# EAGLE board tl300-4c-driver_sch-pcb (EAGLE 9.5.1)
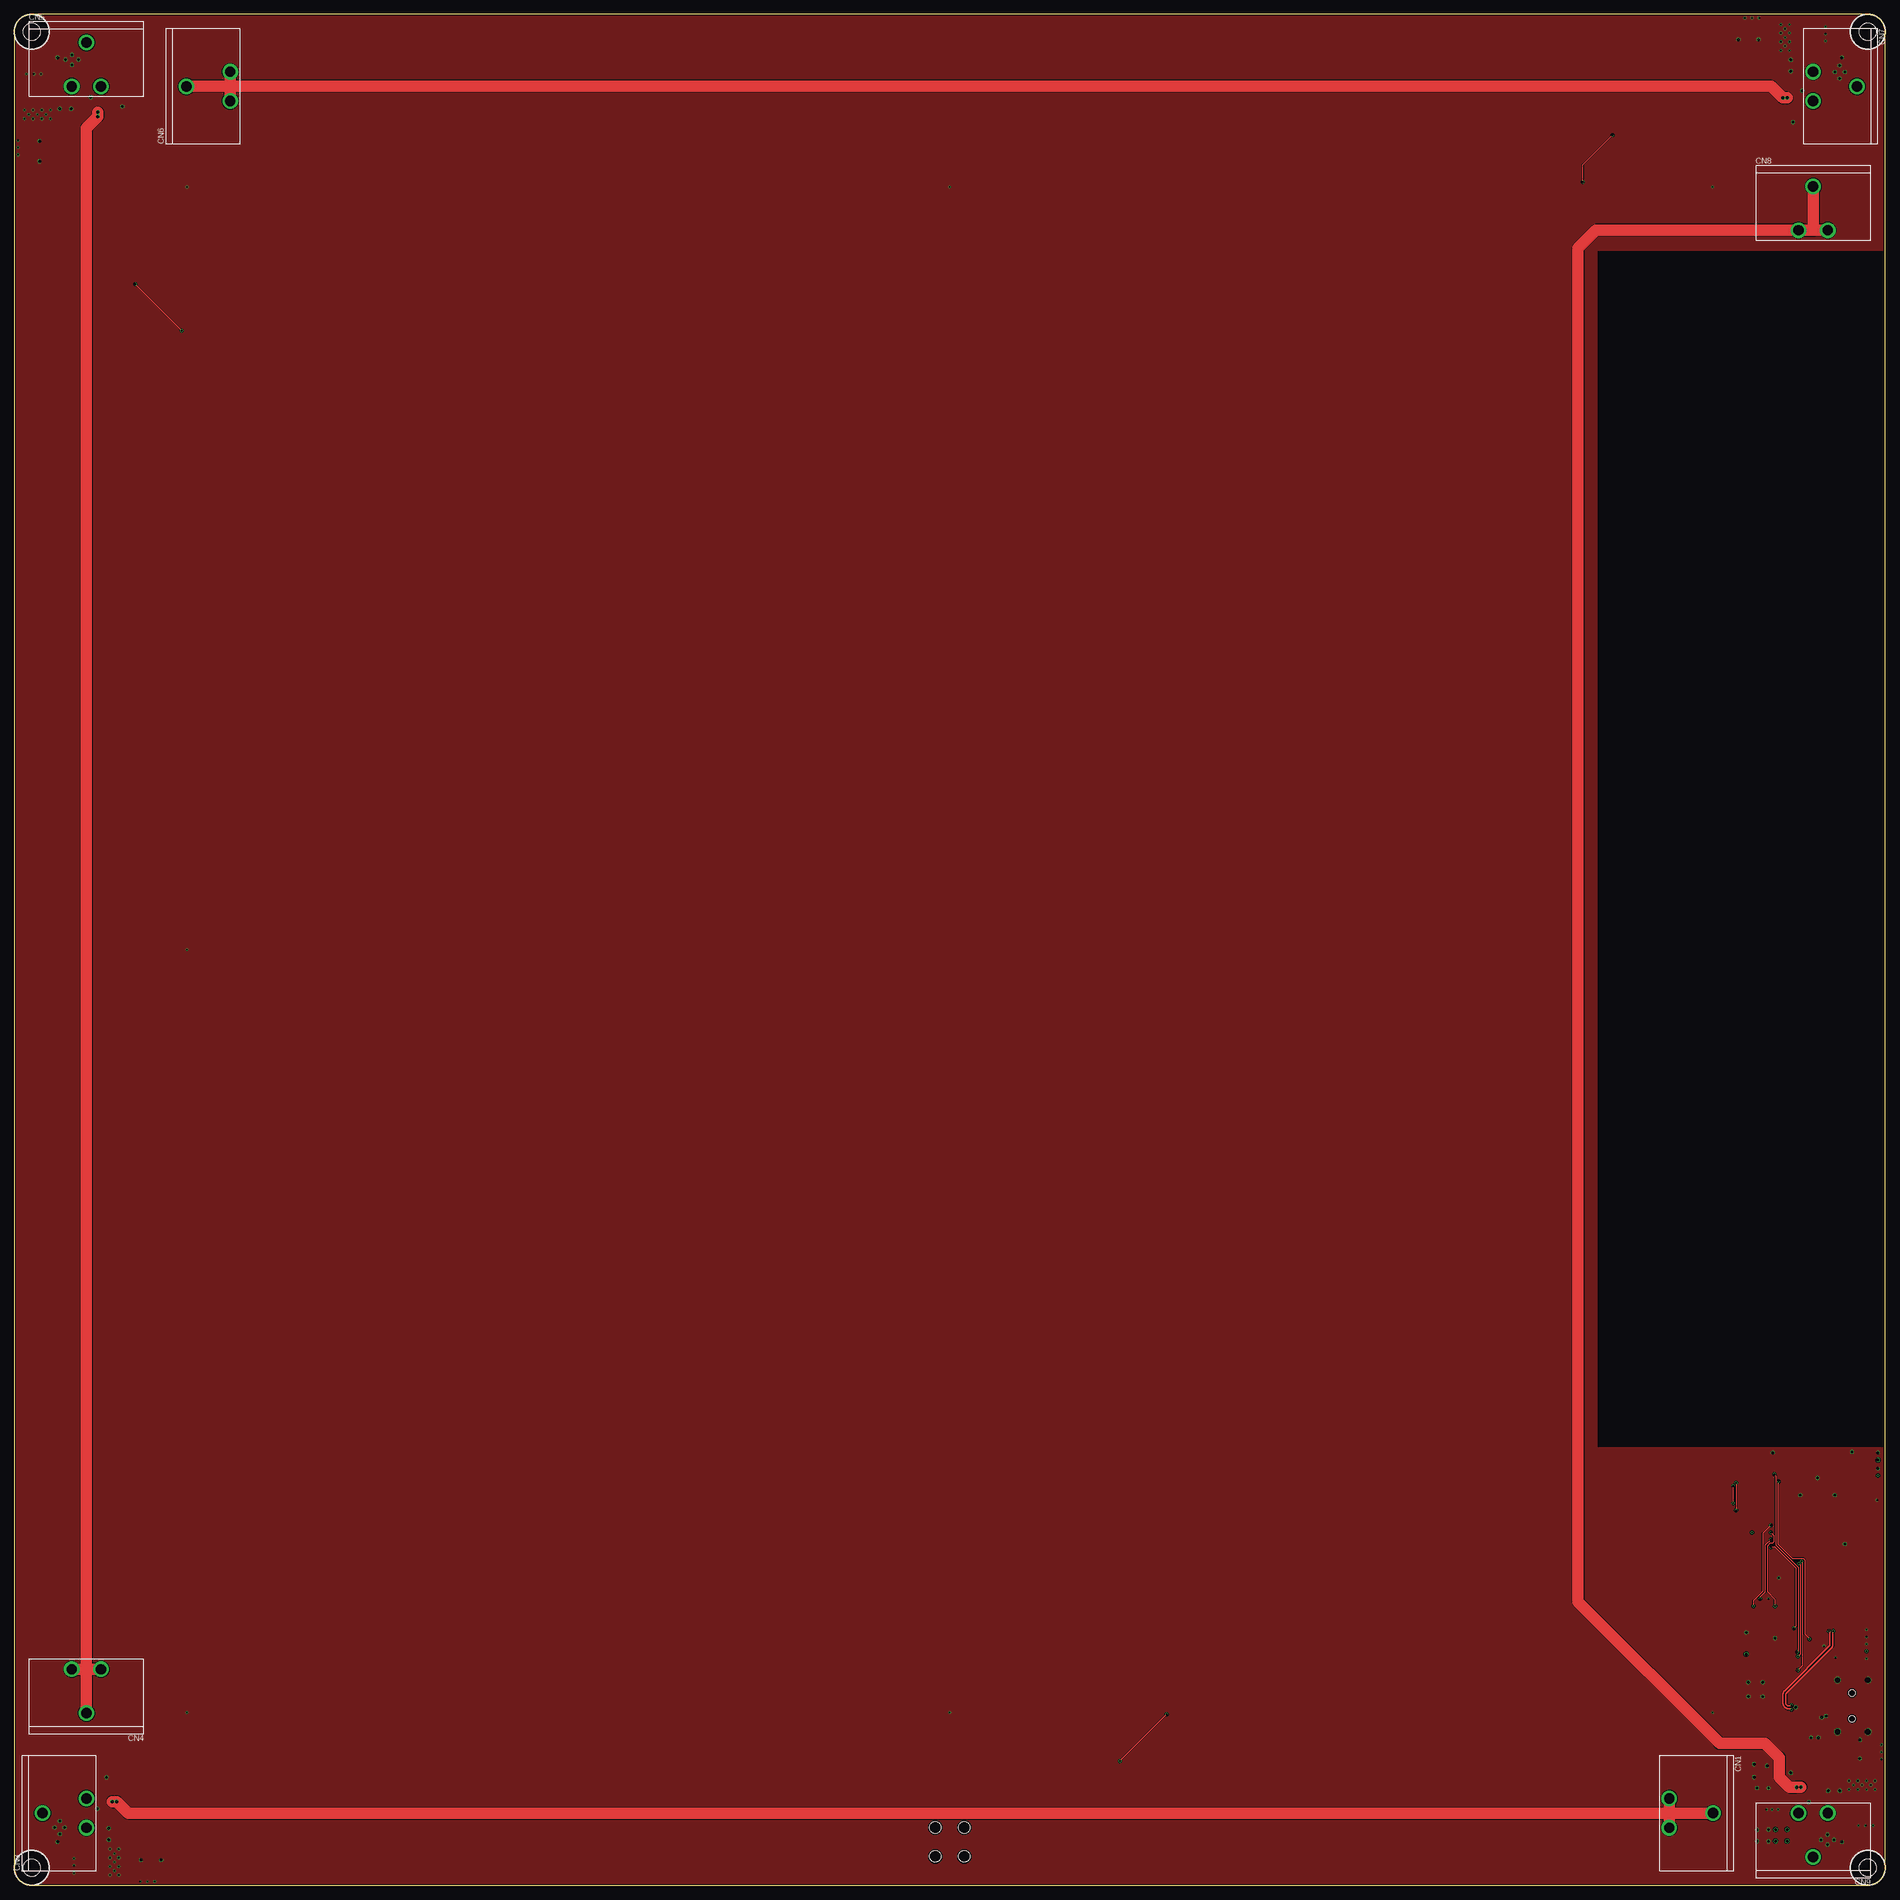
[diagram p0: board, top side]
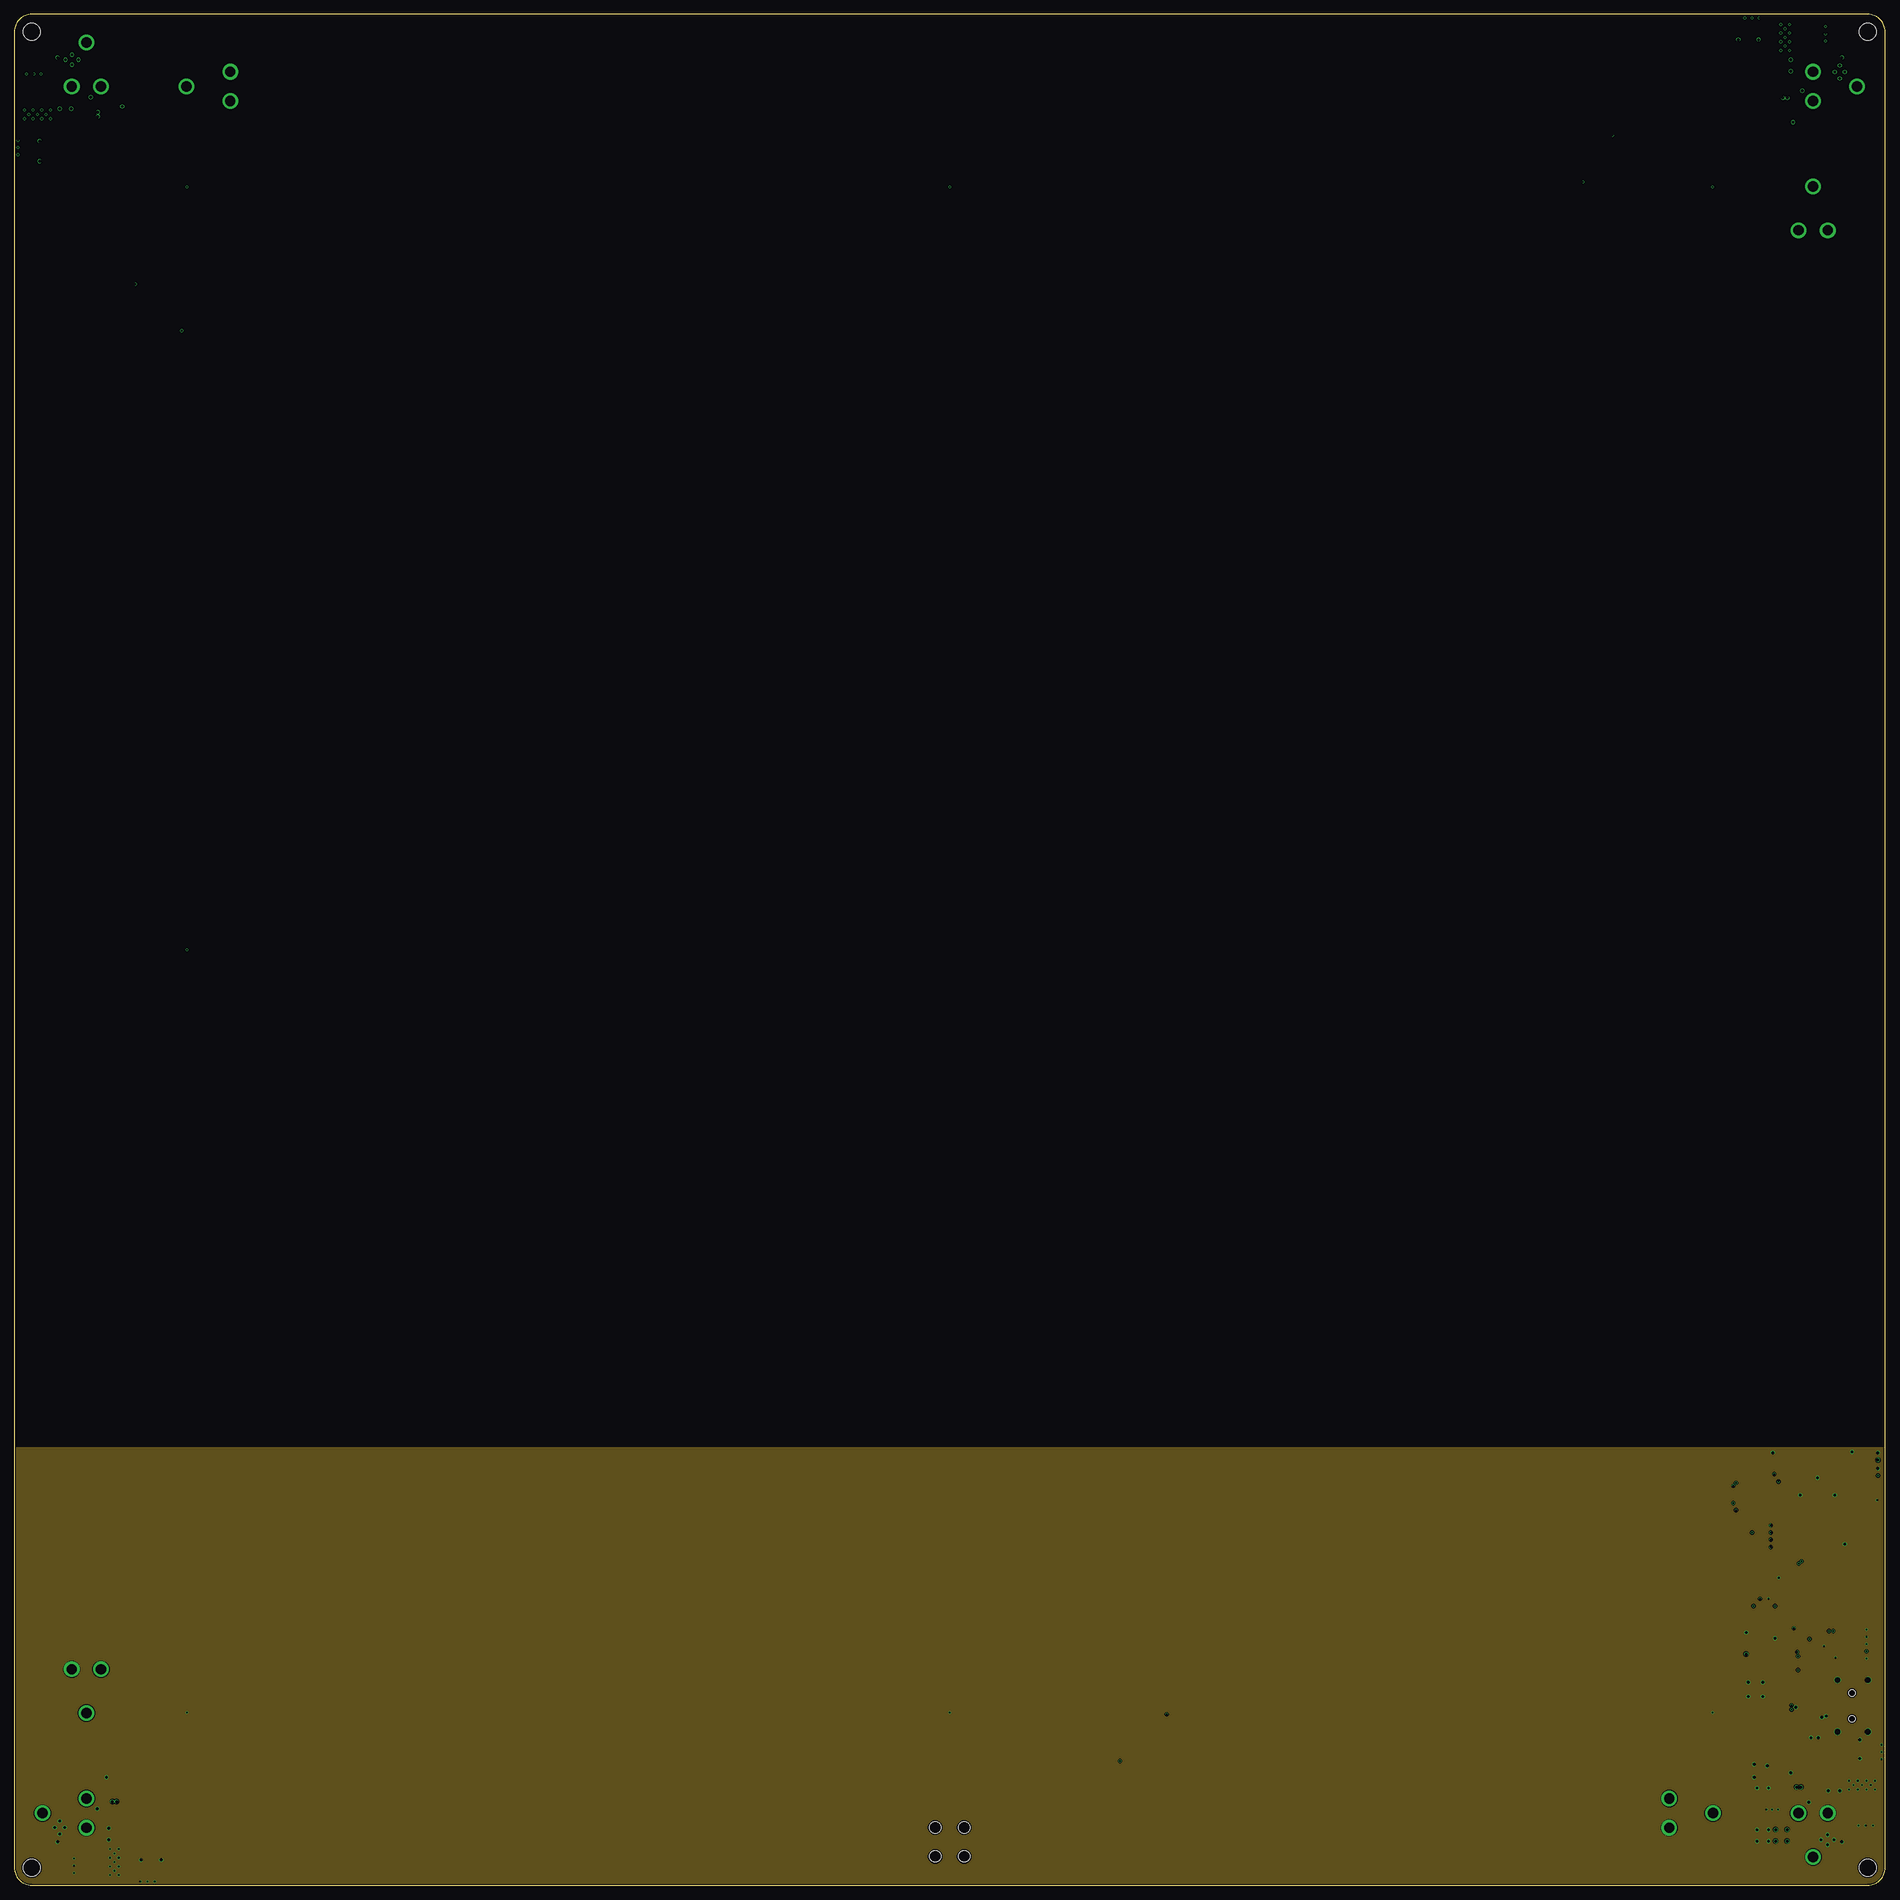
[diagram p1: board, inner layer GND]
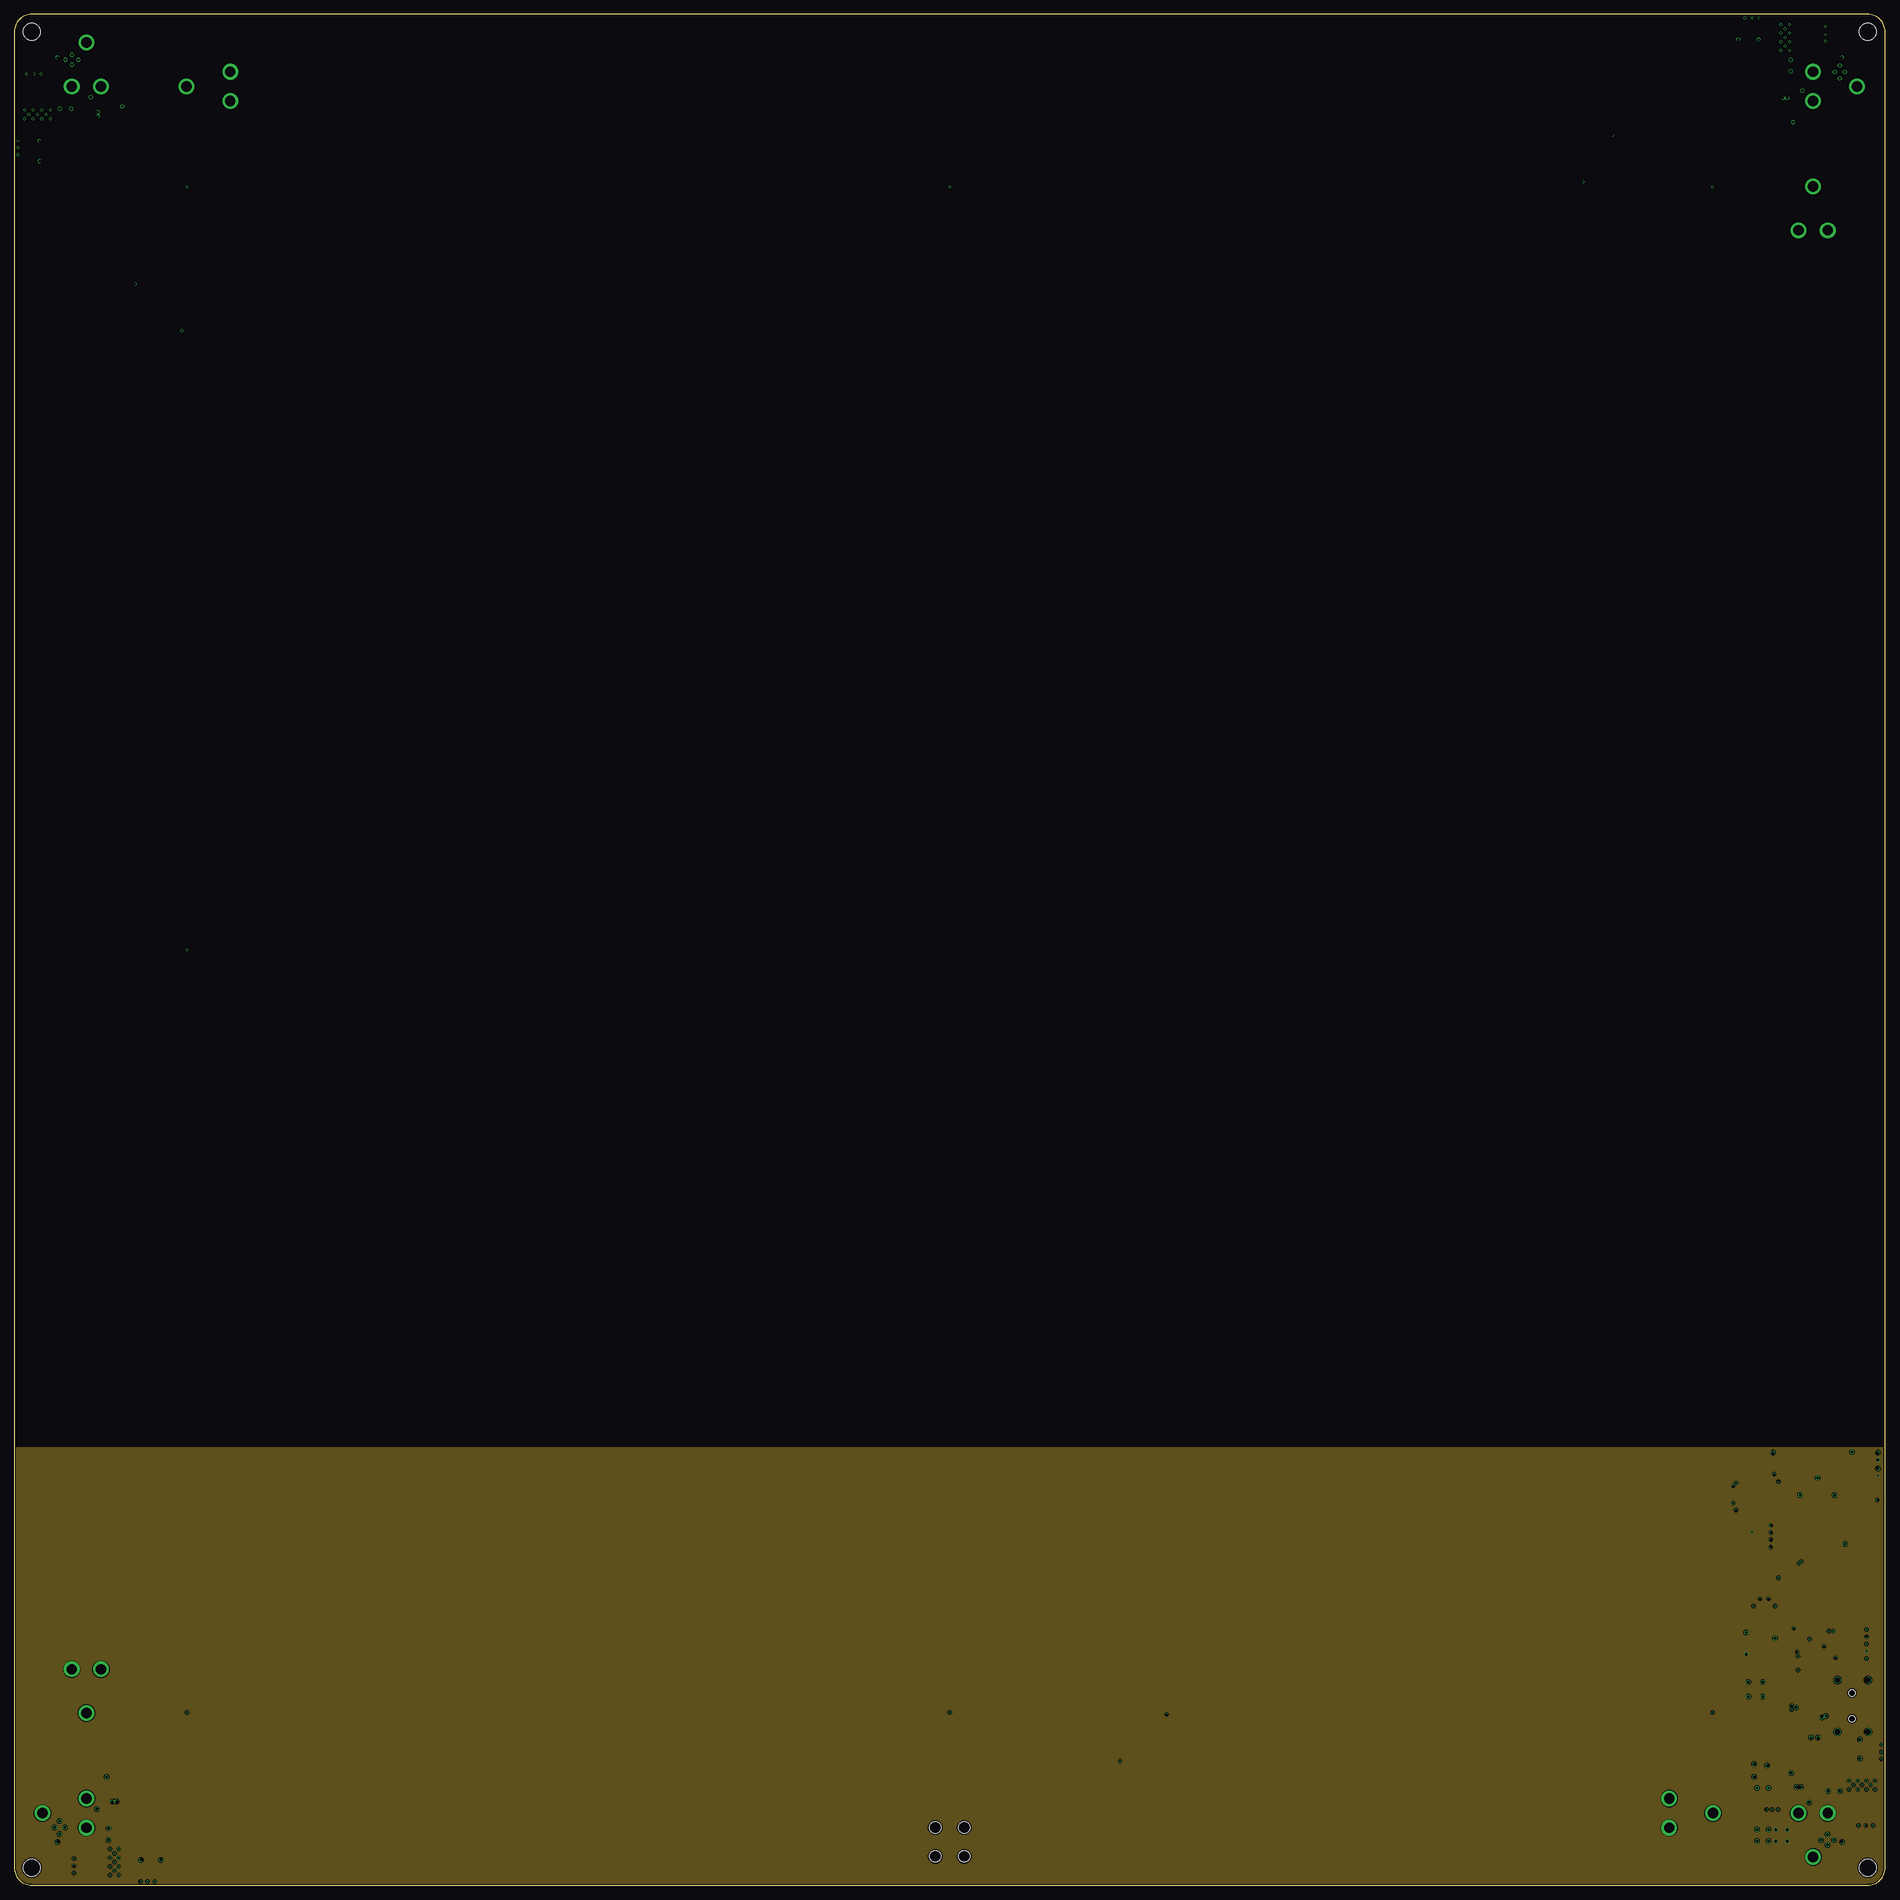
[diagram p2: board, inner layer PWR]
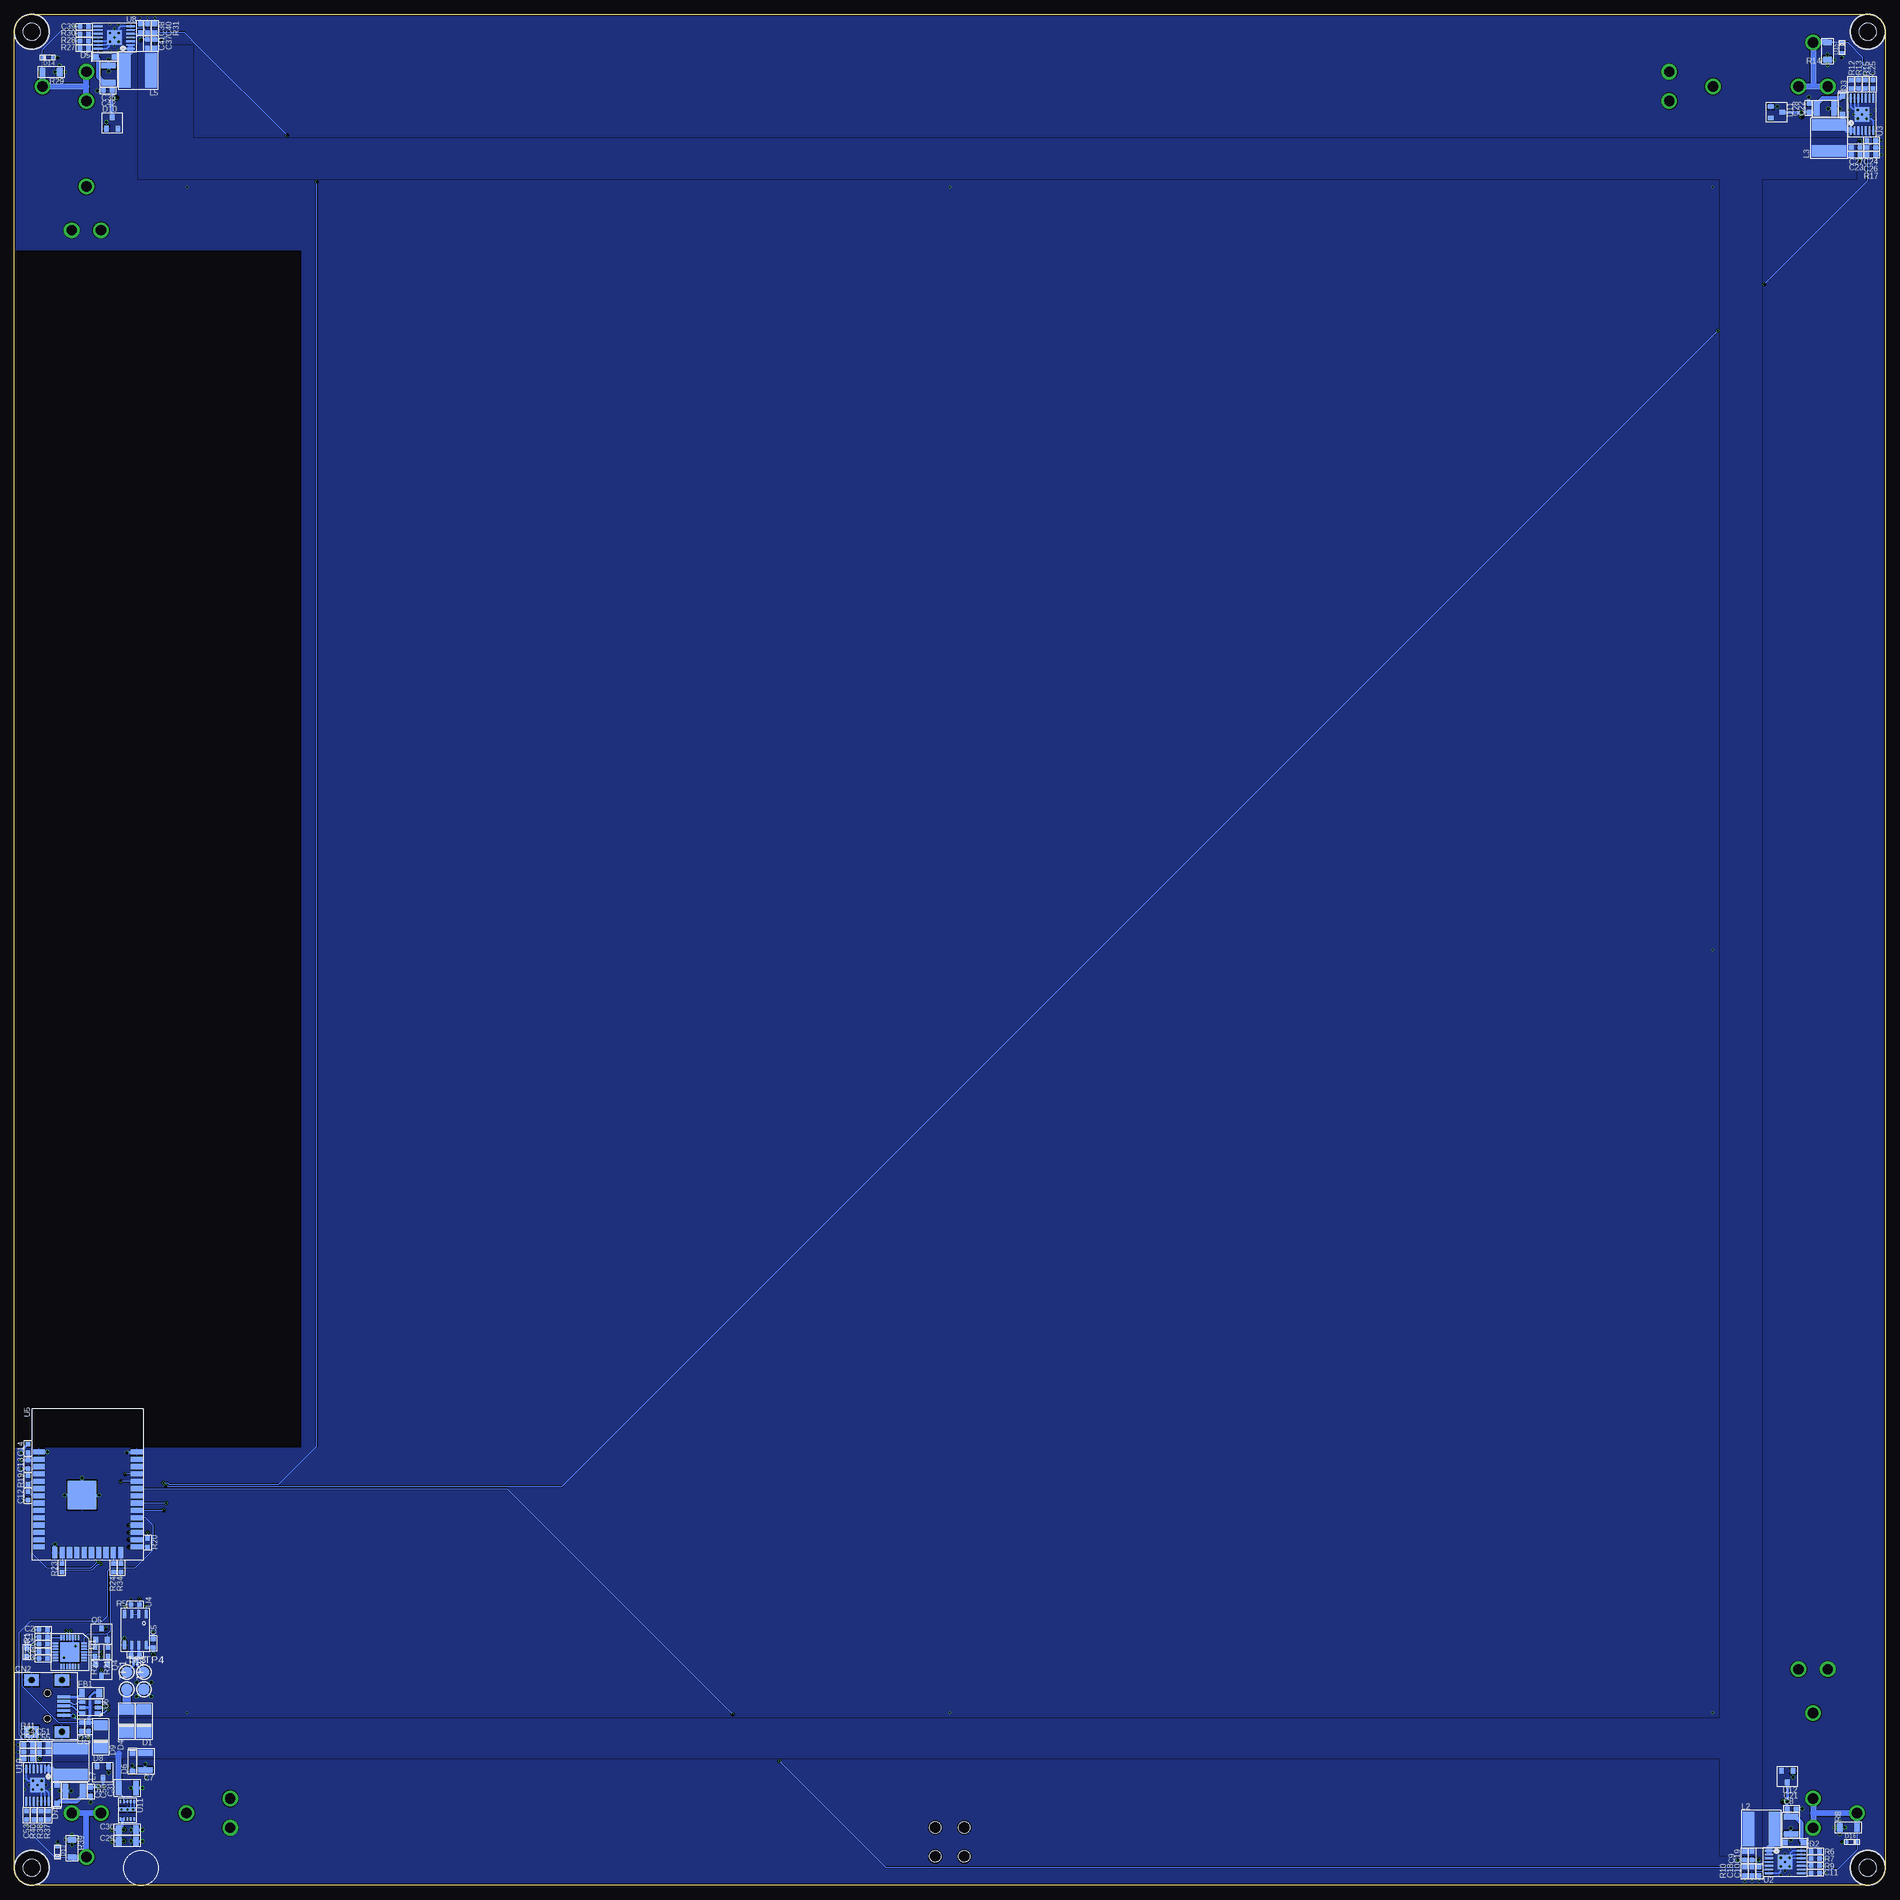
[diagram p3: board, bottom side, seen from below]

Size 325 x 325 mm. Coordinates in mm from the lower left corner, seen from the top.
Outline: 322,0 arc90 325,3 325,322 arc90 322,325 3,325 arc90 0,322 0,3 arc90 3,0 322,0
Copper layers (1*2*3*16): Top 0.035mm / dielectric 1.11mm / GND 0.035mm / dielectric 0.15mm / PWR 0.035mm / dielectric 0.2mm / Bottom 0.035mm
Design rules "myDRC 4 layers 0.15mm *": minimum track width 0.15mm, minimum drill 0.3mm, track to track 0.15mm, track to pad 0.15mm, pad to pad 0.15mm, via to via 0.15mm, smd to smd 0mil, copper to edge 0.25mm, drill to drill 0.25mm, minimum pad ring 10mil, minimum via ring 3mil, stop-mask expansion 4mil, vias tented up to drill 1mm, thermal gap 10mil
Holes 2 mm at 165,10 160,10 165,5 160,5

## Footprints (pad centres in the part's own frame; a part is rotated, then mirrored left to right if it is on the bottom)
0603 = smd 0.8 x 0.8: 1 -0.75,0; 2 0.75,0
1210 = smd 1 x 2.5: 1 -1.5,0; 2 1.5,0
1206 = smd 1 x 1.5: 1 1.5,0; 2 -1.5,0
KEYSTONE_54 = drill 1.8: P$1 -2.54,0; P$2 2.54,0; P$3 0,7.62
MUSB-05-S-B-SM-A = smd 0.5 x 2.25: D+ 0,2.8; D- -0.8,2.8; GND 1.6,2.8; ID 0.8,2.8; VCC -1.6,2.8 | smd 2 x 2.5: SHIELD1 -4.5,2.5; SHIELD2 4.5,2.5; SHIELD3 4.5,-2.75; SHIELD4 -4.5,-2.75 | hole 1.1: 2.25,0; -2.25,0
DO214AC = smd 1.75 x 2.5: A -2,0; K 2,0
SOD-123 = smd 0.9 x 0.95: A -1.575,0; K 1.575,0
SOT23-3 = smd 0.8 x 1: 1 -1,-1; 2 0,1; 3 1,-1
SC-79 = smd 0.75 x 0.5: A 0,-0.875; K 0,0.875
SRN6045 = smd 2 x 6: 1 -2.25,0; 2 2.25,0
MOUNTHOLE_6X3 = hole 3: 0,0
2MM_TEST_PAD = smd 2 x 2: 1 0,0
QFN28 = smd 0.95 x 0.3: 1 -2.5,1.5; 2 -2.5,1; 3 -2.5,0.5; 4 -2.5,0; 5 -2.5,-0.5; 6 -2.5,-1; 7 -2.5,-1.5; 15 2.5,-1.5; 16 2.5,-1; 17 2.5,-0.5; 18 2.5,0; 19 2.5,0.5; 20 2.5,1; 21 2.5,1.5 | smd 0.3 x 0.95: 8 -1.5,-2.5; 9 -1,-2.5; 10 -0.5,-2.5; 11 0,-2.5; 12 0.5,-2.5; 13 1,-2.5; 14 1.5,-2.5; 22 1.5,2.5; 23 1,2.5; 24 0.5,2.5; 25 0,2.5; 26 -0.5,2.5; 27 -1,2.5; 28 -1.5,2.5 | smd 3.35 x 3.35: 29 0,0
HTSSOP14-4.5 = smd 1.5 x 0.3: 1 -2.8,1.95; 2 -2.8,1.3; 3 -2.8,0.65; 4 -2.8,0; 5 -2.8,-0.65; 6 -2.8,-1.3; 7 -2.8,-1.95; 8 2.8,-1.95; 9 2.8,-1.3; 10 2.8,-0.65; 11 2.8,0; 12 2.8,0.65; 13 2.8,1.3; 14 2.8,1.95 | smd 2.5 x 2.5: PAD 0,0
SO8 = smd 1.5 x 0.55: 1 -2.7,1.875; 2 -2.7,0.625; 3 -2.7,-0.625; 4 -2.7,-1.875; 5 2.7,-1.875; 6 2.7,-0.625; 7 2.7,0.625; 8 2.7,1.875
ESP32-WROOM-32D = smd 2 x 0.9: 1 -8.5,5.25; 2 -8.5,3.98; 3 -8.5,2.71; 4 -8.5,1.44; 5 -8.5,0.17; 6 -8.5,-1.1; 7 -8.5,-2.37; 8 -8.5,-3.64; 9 -8.5,-4.91; 10 -8.5,-6.18; 11 -8.5,-7.45; 12 -8.5,-8.72; 13 -8.5,-9.99; 14 -8.5,-11.26; 25 8.5,-11.26; 26 8.5,-9.99; 27 8.5,-8.72; 28 8.5,-7.45; 29 8.5,-6.18; 30 8.5,-4.91; 31 8.5,-3.64; 32 8.5,-2.37; 33 8.5,-1.1; 34 8.5,0.17; 35 8.5,1.44; 36 8.5,2.71; 37 8.5,3.98; 38 8.5,5.25 | smd 0.9 x 2: 15 -5.715,-12.26; 16 -4.445,-12.26; 17 -3.175,-12.26; 18 -1.905,-12.26; 19 -0.635,-12.26; 20 0.635,-12.26; 21 1.905,-12.26; 22 3.175,-12.26; 23 4.445,-12.26; 24 5.715,-12.26 | smd 5 x 5: 39 -1,-2.25
SOT23-6 = smd 0.6 x 1.1: 1 0.95,1.35; 2 0,1.35; 3 -0.95,1.35; 4 -0.95,-1.35; 5 0,-1.35; 6 0.95,-1.35
TI_MICROSIP_10 = smd 0.65 x 0.3: 1 -1.5,1.2; 2 -1.5,0.6; 3 -1.5,0; 4 -1.5,-0.6; 5 -1.5,-1.2; 6 1.5,-1.2; 7 1.5,-0.6; 8 1.5,0; 9 1.5,0.6; 10 1.5,1.2 | smd 0.7 x 2.9: PAD -0.175,0

## Placement (x,y rotation side)
C1  100nF 16V  [0603]  320,43.12 0 bottom
C2  4.7uF 6.3V  [0603]  320,44.38 0 bottom
C3  100nF 16V  [0603]  313.38,27.5 90 bottom
C4  1nF 50V  [0603]  312.12,27.5 90 bottom
C5  100nF 16V  [0603]  300.88,42 270 bottom
C7  10uF 50V  [1210]  302.25,21.5 90 bottom
C8  10uF 50V  [1210]  16.38,10.38 90 bottom
C9  2.2uF 25V  [0603]  24.38,5.12 90 bottom
C10  47nF 16V  [0603]  21.88,2.38 90 bottom
C11  470nF 25V  [0603]  12.12,2.12 180 bottom
C12  1nF 50V  [0603]  322.62,67.62 90 bottom
C13  100nF 16V  [0603]  322.62,73.12 90 bottom
C14  10uF 10V  [0603]  322.62,75.88 270 bottom
C18  1uF 25V  [0603]  23.12,2.38 90 bottom
C19  100nF 100V  [0603]  23.12,5.12 90 bottom
C21  100nF 100V  [0603]  16.25,13.25 180 bottom
C22  10uF 50V  [1210]  10.38,308.62 180 bottom
C23  2.2uF 25V  [0603]  5.12,300.62 180 bottom
C24  47nF 16V  [0603]  2.38,303.12 180 bottom
C25  470nF 25V  [0603]  2.12,312.88 270 bottom
C26  1uF 25V  [0603]  2.38,301.88 180 bottom
C27  100nF 100V  [0603]  5.12,301.88 180 bottom
C28  100nF 100V  [0603]  13.25,308.75 270 bottom
C29  22uF 10V  [1206]  305.38,7.62 0 bottom
C30  22uF 10V  [1206]  305.38,9.62 0 bottom
C31  10uF 50V  [1210]  305.38,16.88 180 bottom
C36  10uF 50V  [1210]  308.62,314.62 270 bottom
C37  2.2uF 25V  [0603]  300.62,319.88 270 bottom
C38  47nF 16V  [0603]  303.12,322.62 270 bottom
C39  470nF 25V  [0603]  312.88,322.88 0 bottom
C40  1uF 25V  [0603]  301.88,322.62 270 bottom
C41  100nF 100V  [0603]  301.88,319.88 270 bottom
C42  100nF 100V  [0603]  308.75,311.75 0 bottom
C50  10uF 50V  [1210]  314.62,16.38 0 bottom
C51  2.2uF 25V  [0603]  319.88,24.38 0 bottom
C52  47nF 16V  [0603]  322.62,21.88 0 bottom
C53  470nF 25V  [0603]  322.88,12.12 90 bottom
C54  1uF 25V  [0603]  322.62,23.12 0 bottom
C55  100nF 100V  [0603]  319.88,23.12 0 bottom
C56  100nF 100V  [0603]  311.75,16.25 90 bottom
CN1  KS 54  [KEYSTONE_54]  287.5,12.5 270 top
CN2  MINI B USB  [MUSB-05-S-B-SM-A]  319.25,31.12 270 bottom
CN3  KS 54  [KEYSTONE_54]  12.5,12.5 90 top
CN4  KS 54  [KEYSTONE_54]  12.5,37.5 180 top
CN5  KS 54  [KEYSTONE_54]  12.5,312.5 0 top
CN6  KS 54  [KEYSTONE_54]  37.5,312.5 90 top
CN7  KS 54  [KEYSTONE_54]  312.5,312.5 270 top
CN8  KS 54  [KEYSTONE_54]  312.5,287.5 0 top
CN9  KS 54  [KEYSTONE_54]  312.5,12.5 180 top
D1  B360A-13-F  [DO214AC]  302.5,28.5 270 bottom
D2  B0540W  [SOD-123]  15.75,7.38 0 bottom
D3  B0540W  [SOD-123]  7.38,309.25 90 bottom
D4  B360A-13-F  [DO214AC]  305.5,28.5 270 bottom
D5  B0540W  [SOD-123]  309.25,317.62 180 bottom
D6  B0540W  [SOD-123]  304.5,21.38 90 bottom
D7  B0540W  [SOD-123]  317.62,15.75 270 bottom
D8  36V  [SOT23-3]  309.62,19.62 180 bottom
D9  B360A-13-F  [DO214AC]  310,25.75 270 bottom
D10  36V  [SOT23-3]  308,306.12 0 bottom
D11  36V  [SOT23-3]  18.88,308 270 bottom
D12  36V  [SOT23-3]  17,18.88 180 bottom
D13  1V  [SC-79]  317.5,5.75 180 bottom
D14  1V  [SC-79]  319.25,317.5 90 bottom
D15  1V  [SC-79]  7.5,319.25 0 bottom
D16  1V  [SC-79]  5.75,7.5 270 bottom
FB1  150R 100MHz  [1206]  311.75,33.38 180 bottom
L2  10uH  [SRN6045]  21.5,9.75 0 bottom
L3  10uH  [SRN6045]  9.75,303.5 90 bottom
L5  10uH  [SRN6045]  303.5,315.25 180 bottom
L7  10uH  [SRN6045]  315.25,21.5 270 bottom
MECH1  6mm x 3mm  [MOUNTHOLE_6X3]  3,3 0 top
MECH2  6mm x 3mm  [MOUNTHOLE_6X3]  3,322 0 top
MECH3  6mm x 3mm  [MOUNTHOLE_6X3]  322,3 0 top
MECH4  6mm x 3mm  [MOUNTHOLE_6X3]  322,322 0 top
Q4  MMBT3904  [SOT23-3]  309.88,37.38 180 bottom
Q5  MMBT3904  [SOT23-3]  309.88,43.62 0 bottom
R1  10k  [0603]  322.88,40.5 90 bottom
R2  20k  [0603]  320,41.88 0 bottom
R3  10k  [0603]  320,39.38 0 bottom
R4  2.2k  [0603]  320,40.62 180 bottom
R5  10k  [0603]  304,48.75 0 bottom
R6  270k  [0603]  12.12,5.88 0 bottom
R7  10k  [0603]  12.12,4.62 180 bottom
R8  1R  [1206]  6.38,10 180 bottom
R9  430k  [0603]  12.12,3.38 180 bottom
R10  10k  [0603]  24.38,2.38 90 bottom
R12  270k  [0603]  5.88,312.88 90 bottom
R13  10k  [0603]  4.62,312.88 270 bottom
R14  1R  [1206]  10,318.62 270 bottom
R15  430k  [0603]  3.38,312.88 270 bottom
R17  10k  [0603]  2.38,300.62 180 bottom
R18  120R  [0603]  304,40 180 bottom
R19  10k  [0603]  322.62,70.38 90 bottom
R20  5.1k  [0603]  301.88,59.5 90 bottom
R21  10k  [0603]  308.75,40.5 90 bottom
R22  10k  [0603]  311,40.5 270 bottom
R23  0R  [0603]  316.75,55.12 90 bottom
R24  0R  [0603]  307.75,55.12 90 bottom
R27  270k  [0603]  312.88,319.12 180 bottom
R28  10k  [0603]  312.88,320.38 0 bottom
R29  1R  [1206]  318.62,315 0 bottom
R30  430k  [0603]  312.88,321.62 0 bottom
R31  10k  [0603]  300.62,322.62 270 bottom
R34  5.1k  [0603]  306.5,55.12 270 bottom
R37  270k  [0603]  319.12,12.12 270 bottom
R38  10k  [0603]  320.38,12.12 90 bottom
R39  1R  [1206]  315,6.38 90 bottom
R40  430k  [0603]  321.62,12.12 90 bottom
R41  10k  [0603]  322.62,24.38 0 bottom
TP1  2MM_TEST_POINT  [2MM_TEST_PAD]  305.5,34 270 bottom
TP2  2MM_TEST_POINT  [2MM_TEST_PAD]  302.5,34 0 bottom
TP3  2MM_TEST_POINT  [2MM_TEST_PAD]  305.5,37 0 bottom
TP4  2MM_TEST_POINT  [2MM_TEST_PAD]  302.5,37 0 bottom
U1  CP2102  [QFN28]  315.38,40.5 270 bottom
U2  TPS61500  [HTSSOP14-4.5]  17.38,4 0 bottom
U3  TPS61500  [HTSSOP14-4.5]  4,307.62 90 bottom
U4  SN65HVD75D  [SO8]  304,44.38 270 bottom
U5  ESP32  [ESP32-WROOM-32D]  312.25,70 0 bottom
U6  USBLC6-2SC6  [SOT23-6]  311.88,30.88 270 bottom
U8  TPS61500  [HTSSOP14-4.5]  307.62,321 180 bottom
U10  TPS61500  [HTSSOP14-4.5]  321,17.38 270 bottom
U11  3.3V BUCK  [TI_MICROSIP_10]  305.38,13 270 bottom

## Library data of the parts
C1 C3 C5 C13 = CAPACITORS; DIGIKEY: 1276-6582-1-ND; HEIGHT: 1; PRICE_PER: 0.08
C2 = CAPACITORS; FARNELL: 2362095; HEIGHT: 1; PRICE_PER: 0.0414
C4 C12 = CAPACITORS; DIGIKEY: 1276-1018-1-ND; HEIGHT: 1; PRICE_PER: 0.08
C7 C8 C22 C31 C36 C50 = CAPACITORS; DIGIKEY: 445-4537-1-ND; HEIGHT: 3; PRICE_PER: 0.583
C9 C23 C37 C51 = CAPACITORS; DIGIKEY: 490-10731-1-ND; HEIGHT: 1; PRICE_PER: 0.14
C10 C24 C38 C52 = CAPACITORS; DIGIKEY: 1276-2079-1-ND; HEIGHT: 1; PRICE_PER: 0.08
C11 C25 C39 C53 = CAPACITORS; DIGIKEY: 490-3291-1-ND; HEIGHT: 1; PRICE_PER: 0.2
C14 = CAPACITORS; DIGIKEY: 490-10474-1-ND; HEIGHT: 0.95; PRICE_PER: 0.17
C18 C26 C40 C54 = CAPACITORS; DIGIKEY: 1276-1102-1-ND; HEIGHT: 1; PRICE_PER: 0.08
C19 C21 C27 C28 C41 C42 C55 C56 = CAPACITORS; DIGIKEY: 478-10047-1-ND; HEIGHT: 1; PRICE_PER: 0.14
C29 C30 = CAPACITORS; DIGIKEY: 1276-3148-6-ND; HEIGHT: 1.8; PRICE_PER: 0.47
CN1 CN3-CN9 = CONNECTORs; DIGIKEY: 36-54-ND; HEIGHT: 17; PRICE_PER: 0.46
CN2 = CONNECTORs; DIGIKEY: SAM8841-ND; HEIGHT: 4; PRICE_PER: 1.11
D1 D4 D9 = DIODES; DIGIKEY: B360A-FDICT-ND; HEIGHT: 2; PRICE_PER: 0.31
D2 D3 D5-D7 = DIODES; DIGIKEY: B0540W-FDICT-ND; HEIGHT: 1; PRICE_PER: 0.153
D8 D10-D12 = DIODES; DIGIKEY: GSOT36-HE3-08GICT-ND; HEIGHT: 1; PRICE_PER: 0.3
D13-D16 = DIODES; DIGIKEY: VESD01C1-02VHG3-08GICT-ND; HEIGHT: 1; PRICE_PER: 0.3
FB1 = INDUCTORS; DIGIKEY: 541-2281-1-ND; HEIGHT: 1.5; PRICE_PER: 0.14
L2 L3 L5 L7 = INDUCTORS; DIGIKEY: SRN6045-100MCT-ND; HEIGHT: 5; PRICE_PER: 0.45
MECH1-MECH4 TP1-TP4 = MISC
Q4 Q5 = TRANSISTORs; DIGIKEY: MMBT3904-FDICT-ND; HEIGHT: 0.8; PRICE_PER: 0.1
R1 R3 R5 R7 R10 R13 R17 R19 R21 R22 R28 R31 R38 R41 = r_0603; DIGIKEY: P10.0KHCT-ND; PRICE_PER: 0.10000
R2 = r_0603; DIGIKEY: P20.0KHCT-ND; PRICE_PER: 0.10000
R4 = r_0603; DIGIKEY: P2.20KHCT-ND; PRICE_PER: 0.10000
R6 R12 R27 R37 = r_0603; DIGIKEY: P270KHCT-ND; PRICE_PER: 0.10000
R8 R14 R29 R39 = RESISTORS; DIGIKEY: 541-1.00FFCT-ND; HEIGHT: 0.65; PRICE_PER: 0.08
R9 R15 R30 R40 = r_0603; DIGIKEY: P430KHCT-ND; PRICE_PER: 0.10000
R18 = r_0603; DIGIKEY: P120HCT-ND; PRICE_PER: 0.10000
R20 R34 = r_0603; DIGIKEY: P5.10KHCT-ND; PRICE_PER: 0.10000
R23 R24 = RESISTORS; DIGIKEY: 541-0.0GCT-ND; HEIGHT: 0.5; PRICE_PER: 0.08
U1 = ICs; DIGIKEY: 336-3694-ND; HEIGHT: 1.2; PRICE_PER: 1.09
U2 U3 U8 U10 = ICs; DIGIKEY: 296-24014-1-ND; HEIGHT: 1; PRICE_PER: 1.95
U4 = ICs; DIGIKEY: 296-38570-1-ND; HEIGHT: 1.8; PRICE_PER: 2.09
U5 = ICs; DIGIKEY: 1904-1023-1-ND; HEIGHT: 5; PRICE_PER: 3.01
U6 = ICs; DIGIKEY: 497-5235-1-ND; HEIGHT: 1.5; PRICE_PER: 0.38
U11 = ICs; DIGIKEY: 296-49458-1-ND; HEIGHT: 1.6; PRICE_PER: 4.24

## Nets
3V3: C5.2 C13.2 C14.2 C29.2 C30.2 R4.2 R19.2 R20.2 U4.8 U5.2 U11.6 U11.7
5VUSB: C3.2 C4.2 D9.A FB1.2 R1.1 U6.5
ESP32_EN: C12.2 Q4.2 R19.1 U5.3
ESP32_UART_!DTR: Q5.3 R21.2 R24.1 U1.28
ESP32_UART_!RTS: Q4.3 R22.2 R23.1 U1.24
ESP32_UART_RX: U1.26 U5.34
ESP32_UART_TX: U1.25 U5.35
ESP_IO0: Q5.2 R20.1 U5.25
ESP_IO13: R23.2 U5.16
ESP_IO15: R24.2 U5.23
ESP_RS485_DE: R5.2 U4.2 U4.3 U5.26
ESP_RS485_UART_RX: U4.4 U5.27
ESP_RS485_UART_TX: U4.1 U5.28
GND: C1.1 C2.1 C3.1 C4.1 C5.1 C7.1 C8.1 C9.1 C10.1 C11.1 C12.1 C13.1 C14.1 C18.1 C19.1 C21.1 C22.1 C23.1 C24.1 C25.1 C26.1 C27.1 C28.1 C29.1 C30.1 C31.1 C36.1 C37.1 C38.1 C39.1 C40.1 C41.1 C42.1 C50.1 C51.1 C52.1 C53.1 C54.1 C55.1 C56.1 CN2.GND CN2.SHIELD1 CN2.SHIELD2 CN2.SHIELD3 CN2.SHIELD4 D6.A D8.1 D10.1 D11.1 D12.1 D13.A D14.A D15.A D16.A R2.1 R3.1 R5.1 R7.1 R8.1 R9.1 R10.1 R13.1 R14.1 R15.1 R17.1 R28.1 R29.1 R30.1 R31.1 R34.2 R38.1 R39.1 R40.1 R41.1 TP2.1 U1.3 U1.29 U2.7 U2.12 U2.13 U2.14 U2.PAD U3.7 U3.12 U3.13 U3.14 U3.PAD U4.5 U5.1 U5.15 U5.38 U5.39 U6.2 U8.7 U8.12 U8.13 U8.14 U8.PAD U10.7 U10.12 U10.13 U10.14 U10.PAD U11.1 U11.2 U11.PAD
LED0_A: C8.2 C21.2 CN1.P$1 CN1.P$2 CN1.P$3 D2.K D12.2 R6.2
LED0_K: CN3.P$1 CN3.P$2 CN3.P$3 D16.K R8.2 U2.9
LED1_A: C22.2 C28.2 CN4.P$1 CN4.P$2 CN4.P$3 D3.K D11.2 R12.2
LED1_K: CN5.P$1 CN5.P$2 CN5.P$3 D15.K R14.2 U3.9
LED2_A: C36.2 C42.2 CN6.P$1 CN6.P$2 CN6.P$3 D5.K D10.2 R27.2
LED2_K: CN7.P$1 CN7.P$2 CN7.P$3 D14.K R29.2 U8.9
LED3_A: C50.2 C56.2 CN8.P$1 CN8.P$2 CN8.P$3 D7.K D8.2 R37.2
LED3_K: CN9.P$1 CN9.P$2 CN9.P$3 D13.K R39.2 U10.9
LED_PWM_0: R41.2 U5.29 U10.4
LED_PWM_1: R31.2 U5.30 U8.4
LED_PWM_2: R17.2 U3.4 U5.31
LED_PWM_3: R10.2 U2.4 U5.33
N$1: R1.2 R2.2 U1.8
N$2: R4.1 U1.9
N$3: R3.2 U1.11
N$5: D1.A D4.A TP1.1
N$6: C10.2 U2.5
N$7: C1.2 C2.2 U1.6 U1.7
N$8: R9.2 U2.10
N$9: C18.2 U2.6
N$10: C11.2 U2.8
N$11: R6.1 R7.2 U2.11
N$12: D2.A L2.2 U2.1 U2.2
N$13: R34.1 U5.24
N$14: C24.2 U3.5
N$15: R15.2 U3.10
N$16: C26.2 U3.6
N$17: C25.2 U3.8
N$18: R12.1 R13.2 U3.11
N$19: D3.A L3.2 U3.1 U3.2
N$20: CN2.VCC FB1.1
N$26: C38.2 U8.5
N$27: R30.2 U8.10
N$28: C40.2 U8.6
N$29: C39.2 U8.8
N$30: R27.1 R28.2 U8.11
N$31: D5.A L5.2 U8.1 U8.2
N$38: C52.2 U10.5
N$39: R40.2 U10.10
N$40: C54.2 U10.6
N$41: C53.2 U10.8
N$42: R37.1 R38.2 U10.11
N$43: D7.A L7.2 U10.1 U10.2
N$95: CN2.D- U6.4
N$96: CN2.D+ U6.6
N$97: U1.5 U6.3
N$98: U1.4 U6.1
N$99: Q4.1 R21.1
N$100: Q5.1 R22.1
RS485_A: R18.2 TP3.1 U4.6
RS485_B: R18.1 TP4.1 U4.7
VIN: C7.2 C9.2 C19.2 C23.2 C27.2 C31.2 C37.2 C41.2 C51.2 C55.2 D1.K D4.K D6.K D9.K L2.1 L3.1 L5.1 L7.1 U2.3 U3.3 U8.3 U10.3 U11.3 U11.4

## Tracks (layer width: path | path; a pad name or v marks a point on that pad's centre or on a via)
3V3  (via drill 0.3, 0.5)
  Bottom 0.15: R20.2 v301.88,61.25 | v323.75,71.12 323.71,71.09 323.5,71.09 323.57,71.12 R19.2 | R4.2 v321.75,40.62
  Bottom 0.25: U11.6 306.25,11.5 U11.7
  Bottom 0.5: C14.2 C13.2 | v323.75,73.88 C13.2 | C30.2 306.25,10.25 306.25,11.5 | C30.2 C29.2 | C30.2 v308,9.62 | C29.2 v308,7.62 | C30.2 v306,9.62 | C29.2 v306,7.62 | 320.77,74 U5.2 320.86,73.88 C13.2 | U4.8 302.12,41.25 C5.2 v300.88,40.12 | C13.2 320.89,73.88 | 320.89,73.88 320.77,74 | C13.2 320.89,73.88 | 320.89,73.88 320.77,74
  pour PWR (rank 6): 0,0 325,0 325,76 0,76
5VUSB
  Bottom 0.15: R1.1 323.75,38.88 323.75,34.62 317.38,28.25 C3.2
  Bottom 0.5: C3.2 C4.2 | C4.2 310.5,28.25 D9.A | FB1.2 311.25,33.38 311.88,32.75 311.88,30.88 | C4.2 312.12,29.12 311.88,29.38 311.88,30.88 | U6.5 311.88,30.88
ESP32_EN  (via drill 0.3)
  Top 0.15: v309.88,37.38 310.62,38.12 310.62,56.12 v310.5,56.25
  Bottom 0.15: Q4.2 v309.88,37.38 | U5.3 321.42,72.71 322,72.12 322,70.25 R19.1 C12.2 322,67.75 322,57.75 319.38,55.12 311.62,55.12 v310.5,56.25
ESP32_UART_!DTR
  Bottom 0.15: R21.2 308.88,41.38 Q5.3 308.88,43.62 | U1.28 312.88,43 312.25,43.62 308.88,43.62 | R24.1 308.38,53.75 308.38,44.12 308.88,43.62
ESP32_UART_!RTS  (via drill 0.3)
  Top 0.15: v310,55.88 310.25,55.62 310.25,40.12 v309.88,39.75
  Bottom 0.15: U1.24 311.25,40 R22.2 | R22.2 311,38.5 Q4.3 | R22.2 v309.88,39.75 | R23.1 316.38,54.75 311.5,54.75 310.5,55.75 310.12,55.75 v310,55.88
ESP32_UART_RX  (via drill 0.3)
  Top 0.15: v306.5,70.12 306.38,70 306.38,62 306.38,59.25 308.88,56.75 310.75,56.75 311,56.5 311,43.62 v311.88,42.75
  Bottom 0.15: U1.26 312,41 311.88,41.12 v311.88,42.75 | U5.34 306.45,70.17 v306.5,70.12
ESP32_UART_TX  (via drill 0.3)
  Top 0.15: v305.75,71.38 306,71.12 306,59.12 309.88,55.25 309.88,40.62 v309.75,40.5
  Bottom 0.15: U1.25 v309.75,40.5 | U5.35 305.69,71.44 v305.75,71.38
ESP_IO0  (via drill 0.3)
  Top 0.15: v305.12,58.75 305.88,58.75 309.5,55.12 309.5,45 v309.12,44.62
  Bottom 0.15: Q5.2 v309.12,44.62 | R20.1 U5.25 v305.12,58.75
ESP_IO13
  Bottom 0.15: U5.16 316.69,55.93 R23.2
ESP_IO15
  Bottom 0.15: U5.23 307.81,55.93 R24.2
ESP_RS485_DE  (via drill 0.3)
  Top 0.15: v305.12,60 304.12,59 304.12,50.88 303.25,50 v303.25,49.75
  Bottom 0.15: U4.3 U4.2 303.38,48.62 R5.2 v303.25,49.75 | v305.12,60 U5.26
ESP_RS485_UART_RX  (via drill 0.3)
  Top 0.15: v305.12,61.25 305.62,60.75 305.62,59.62 305.38,59.38 305,59.38 304.5,58.88 304.5,51 305.88,49.62 v305.88,48.5
  Bottom 0.15: v305.12,61.25 305.1,61.28 U5.27 | v305.88,48.5 U4.4
ESP_RS485_UART_TX  (via drill 0.3)
  Top 0.15: v302.12,48.5 302.12,49.38 303.75,51 303.75,61.12 v305.12,62.5
  Bottom 0.15: U5.28 305.07,62.55 v305.12,62.5 | v302.12,48.5 U4.1
GND  (via drill 0.3, 0.35, 0.5, 1)
  Bottom 0.15: C12.1 v323.62,66.88 | R10.1 v24.38,0.62 | C18.1 v23.12,0.62 | C10.1 v21.88,0.62 | C11.1 v10.38,2.12 | R9.1 v10.38,3.38 | R7.1 v10.38,4.62 | R17.1 v0.62,300.62 | C26.1 v0.62,301.88 | C24.1 v0.62,303.12 | C25.1 v2.12,314.62 | R15.1 v3.38,314.62 | R13.1 v4.62,314.62 | R31.1 v300.62,324.38 | C40.1 v301.88,324.38 | C38.1 v303.12,324.38 | C39.1 v314.62,322.88 | R30.1 v314.62,321.62 | R28.1 v314.62,320.38 | R41.1 v324.38,24.38 | C54.1 v324.38,23.12 | C52.1 v324.38,21.88 | C53.1 v322.88,10.38 | R40.1 v321.62,10.38 | R38.1 v320.38,10.38 | R34.2 v306.5,53.38 | U1.3 314.88,41 U1.29 | R3.1 v321.75,39.38 | R2.1 v321.75,41.88 | R5.1 v304.75,49.75
  Bottom 0.25: U11.PAD v305.38,13.12 | U11.1 304.18,13.32 v304.38,13.12 304.62,13.12 304.77,13.28 U11.2 | v321.75,44.38 C2.1 | C1.1 v321.75,43.12 | U1.29 v316.38,39.5
  Bottom 0.3: U2.12 17.38,4.65 U2.PAD 16.5,4.88 | U2.13 16.07,5.3 16.5,4.88 | U2.14 16.05,5.95 16.5,5.5 16.5,4.88 | U2.7 18.45,2.05 18.12,2.38 v18.12,3.25 | U3.12 4.65,307.62 U3.PAD 4.88,308.5 | U3.13 5.3,308.93 4.88,308.5 | U3.14 5.95,308.95 5.5,308.5 4.88,308.5 | U3.7 2.05,306.55 2.38,306.88 v3.25,306.88 | U8.12 307.62,320.35 U8.PAD 308.5,320.12 | U8.13 308.93,319.7 308.5,320.12 | U8.14 308.95,319.05 308.5,319.5 308.5,320.12 | U8.7 306.55,322.95 306.88,322.62 v306.88,321.75 | U10.12 320.35,17.38 U10.PAD 320.12,16.5 | U10.13 319.7,16.07 320.12,16.5 | U10.14 319.05,16.05 319.5,16.5 320.12,16.5 | U10.7 322.95,18.45 322.62,18.12 v321.75,18.12
  Bottom 0.5: v323.75,75.12 323.75,75.5 C14.1 | U5.1 v319.25,75.25 | U5.38 303.88,75.12 v305.5,75.12 | U5.15 317.96,59.22 v318,59.25 | U5.39 v316.25,67.75 | U5.39 v313.25,70.75 | U5.39 v310.25,67.75 | C19.1 v22,4.38 | C9.1 v25.5,4.38 | R8.1 v7,10 | v7.88,8.88 R8.1 | R8.1 v7.88,11.12 | R8.1 v8.75,10 | C27.1 v4.38,303 | C23.1 v4.38,299.5 | R14.1 v10,318 | R14.1 v8.88,317.12 | R14.1 v11.12,317.12 | R14.1 v10,316.25 | C41.1 v303,320.62 | C37.1 v299.5,320.62 | R29.1 v318,315 | R29.1 v317.12,316.12 | R29.1 v317.12,313.88 | R29.1 v316.25,315 | C55.1 v320.62,22 | C51.1 v320.62,25.25 | R39.1 v315,7 | R39.1 v316.12,7.88 | R39.1 v313.88,7.88 | R39.1 v315,8.75 | D6.A v304.5,20.75 | v304.75,9.62 C30.1 v302.75,9.62 | v304.75,7.62 C29.1 v302.75,7.62 | v304.75,16.88 C31.1 v302.75,16.88 | CN2.GND 314.9,29.52 v314.75,29.38 314.5,29.12 v314,29.12 | v16.38,7.88 C8.1 v16.38,9.88 | C21.1 v14.38,13.25 | v7.88,308.62 C22.1 v9.88,308.62 | C28.1 v13.25,310.62 | v308.62,317.12 C36.1 v308.62,315.12 | C42.1 v310.62,311.75 | C56.1 v311.75,14.38 | v315.12,16.38 C50.1 v317.12,16.38 | U6.2 v309.5,30.88 | C3.1 v313.38,25.62 | C4.1 v312.12,25.62 | v302.25,21 C7.1 v302.25,18.75 | C5.1 v300.88,43.88 | U4.5 v305.88,42.88 | TP2.1 v303.75,35.25 | TP2.1 v301.25,35.25 | TP2.1 v301.25,32.75 | TP2.1 v303.75,32.75 | C13.1 v323.75,72.38
  other vias: 17.38,4 16.62,4.75 16.62,3.25 18.12,4.75 17.38,5.5 17.38,2.5 18.12,6.25 16.62,6.25 18.12,1.75 16.62,1.75 4,307.62 4.75,308.38 3.25,308.38 4.75,306.88 5.5,307.62 2.5,307.62 6.25,306.88 6.25,308.38 1.75,306.88 1.75,308.38 307.62,321 308.38,320.25 308.38,321.75 306.88,320.25 307.62,319.5 307.62,322.5 306.88,318.75 308.38,318.75 306.88,323.25 308.38,323.25 321,17.38 320.25,16.62 321.75,16.62 320.25,18.12 319.5,17.38 322.5,17.38 318.75,18.12 318.75,16.62 323.25,18.12 323.25,16.62 306.38,13.12 314.38,41.5 322,35.62 316.75,35.62 322,26.62 316.75,26.62 7.5,7.5 16,18.75 18.75,309 7.5,317.5 309,306.25 317.5,317.5 308.62,19.5 317.5,7.5 162.5,30 30,30 295,30 30,162.5 30,295 162.5,295 295,295
  pour GND (rank 6): 0,0 325,0 325,76 0,76
  pour Bottom (rank 2, no thermals): 19.12,6.5 15.62,6.5 15.62,1.5 19.12,1.5
  pour Bottom (rank 2, no thermals): 6.5,305.88 6.5,309.38 1.5,309.38 1.5,305.88
  pour Bottom (rank 2, no thermals): 305.88,318.5 309.38,318.5 309.38,323.5 305.88,323.5
  pour Bottom (rank 2, no thermals): 318.5,19.12 318.5,15.62 323.5,15.62 323.5,19.12
  pour Top (rank 6): 0,0 325,0 325,76 275,76 275,284 325,284 325,325 0,325
  pour Bottom (rank 6): 0,0 325,0 325,76 275,76 275,284 325,284 325,325 0,325
LED0_A  (via drill 0.5)
  Top 2: v17,14.5 v17.75,14.5 19.75,12.5 287.62,12.5 | 287.62,12.5 CN1.P$3 | CN1.P$1 287.5,12.62 | 287.5,12.62 287.62,12.5 | CN1.P$2 287.5,12.62
  Bottom 0.15: D2.K 12.88,7.38 R6.2
  Bottom 0.5: C8.2 16.94,11.88 17,11.93 C21.2 v17,14.5 | v17,14.5 v17.75,14.5 | D12.2 v17,14.5
  Bottom 0.8: D2.K 14.55,7.75 14.55,10.8 15.62,11.88 C8.2
LED0_K
  Bottom 0.15: R8.2 4.88,6.12 8.25,2.75 14.53,2.75 U2.9
  Bottom 0.152: D16.K R8.2
  Bottom 0.5: CN3.P$3 R8.2
  Bottom 1: CN3.P$2 12.5,12.5 | 12.5,12.5 CN3.P$1 | 12.5,12.5 CN3.P$3 R8.2
LED1_A  (via drill 0.5)
  Top 2: v14.5,308 v14.5,307.25 12.5,305.25 12.5,37.38 | 12.5,37.38 CN4.P$3 | CN4.P$1 12.62,37.5 | 12.62,37.5 12.5,37.38 | CN4.P$2 12.62,37.5
  Bottom 0.15: D3.K 7.38,312.12 R12.2
  Bottom 0.5: C22.2 11.88,308.25 12.12,308 C28.2 v14.5,308 D11.2
  Bottom 0.8: D3.K 7.75,310.45 10.8,310.45 11.88,309.38 C22.2
LED1_K
  Bottom 0.15: R14.2 6.5,320.12 3.88,317.5 3.88,315.88 2.75,314.75 2.75,310.48 U3.9
  Bottom 0.152: D15.K R14.2
  Bottom 0.5: CN5.P$3 R14.2
  Bottom 1: CN5.P$2 12.5,312.5 | 12.5,312.5 CN5.P$1 | 12.5,312.5 CN5.P$3 R14.2
LED2_A  (via drill 0.5)
  Top 2: v308,310.5 v307.25,310.5 305.25,312.5 37.38,312.5 | 37.38,312.5 CN6.P$3 | CN6.P$2 37.5,312.62 | 37.5,312.62 37.38,312.5 | CN6.P$1 37.5,312.62
  Bottom 0.15: D5.K 312.12,317.62 R27.2
  Bottom 0.5: C36.2 308.12,313.12 308,313 C42.2 v308,310.5 D10.2
  Bottom 0.8: D5.K 310.45,317.25 310.45,314.2 309.38,313.12 C36.2
LED2_K
  Bottom 0.15: R29.2 320.12,318.88 316.75,322.25 310.48,322.25 U8.9
  Bottom 0.152: D14.K 320.12,318.88
  Bottom 1: CN7.P$2 312.5,312.5 | 312.5,312.5 CN7.P$1 | 312.5,312.5 CN7.P$3 R29.2
LED3_A  (via drill 0.5)
  Top 1: v309.62,17 v310.38,17
  Top 2: CN8.P$3 312.5,287.62 | CN8.P$2 312.62,287.5 | 312.62,287.5 312.5,287.62 | CN8.P$1 312.62,287.5 | 312.5,287.62 312.38,287.5 274.75,287.5 271.62,284.38 271.62,49.25 296.25,24.62 304.12,24.62 306.62,22.12 306.62,18.75 308.38,17 v309.62,17 v310.38,17
  Bottom 0.15: D7.K 317.62,12.88 R37.2
  Bottom 0.5: C50.2 313.12,16.88 313,17 C56.2 v310.38,17 v309.62,17 D8.2
  Bottom 0.8: D7.K 317.25,14.55 314.2,14.55 313.12,15.62 C50.2
LED3_K
  Bottom 0.15: U10.9 322.25,14.53 322.25,9.12 318,4.88 R39.2
  Bottom 0.152: D13.K 318,4.88
  Bottom 1: CN9.P$2 312.5,12.5 | 312.5,12.5 CN9.P$1 | 312.5,12.5 CN9.P$3 R39.2
LED_PWM_0
  Bottom 0.15: U10.4 321,21.25 321.25,21.5 321.25,23.75 R41.2 322.75,25.25 323.38,25.25 324.12,26 324.12,43.88 322.12,45.88 309.62,45.88 308.75,46.75 308.75,54.62 308.25,55.12 304,55.12 300.88,58.25 300.88,62.5 302.19,63.82 U5.29
LED_PWM_1  (via drill 0.3)
  Top 0.15: v299.12,69.88 v299.12,65.12 | v272.5,295.88 272.5,298.88 v277.62,304
  Bottom 0.15: U8.4 303.75,321 303.5,321.25 301.25,321.25 R31.2 295.5,321.88 293.12,319.5 v277.62,304 | U5.30 303.71,65.12 v299.12,65.12 | v299.12,69.88 298.38,69.88 298.12,69.62 279.12,69.62 272.5,76.25 272.5,294.88 | 272.5,294.88 v272.5,295.88 272.5,294.88
LED_PWM_2  (via drill 0.3)
  Top 0.15: v298.62,66.38 v298.62,69.38 | v21,278.12 v29.06,270.06
  Bottom 0.15: U3.4 4,303.75 3.75,303.5 3.75,301.25 R17.2 3.12,296 20.12,279 | U5.31 303.74,66.38 298.75,66.38 v298.62,66.38 | v298.62,69.38 298.5,69.25 229.88,69.25 29.75,269.38 | 29.75,269.38 v29.06,270.06 29.75,269.38 | 20.12,279 v21,278.12 20.12,279
LED_PWM_3  (via drill 0.3)
  Top 0.15: v192.06,21.56 v200.19,29.69
  Bottom 0.15: U2.4 21.25,4 21.5,3.75 23.75,3.75 R10.2 25.88,3.12 173.62,3.12 191.25,20.75 | U5.33 303.73,68.88 239.38,68.88 202.19,31.69 | 202.19,31.69 v200.19,29.69 202.19,31.69 | 191.25,20.75 v192.06,21.56 191.25,20.75
N$1
  Bottom 0.15: U1.8 319.12,42 R2.2 319.88,41.25 R1.2
N$2
  Bottom 0.15: U1.9 318.5,41.5 318.62,41.38 318.62,41.25 R4.1
N$3
  Bottom 0.15: U1.11 318.5,40.5 318.62,40.38 318.62,40 R3.2
N$5
  Bottom 1.5: D1.A D4.A TP1.1
N$6
  Bottom 0.15: U2.5 21.65,3.35 C10.2
N$7
  Bottom 0.25: U1.6 U1.7 319.12,43 C1.2 C2.2
N$8
  Bottom 0.15: U2.10 12.9,3.35 R9.2
N$9
  Bottom 0.15: C18.2 22.38,2.38 21.38,2.38 21.05,2.7 U2.6
N$10
  Bottom 0.15: C11.2 U2.8
N$11
  Bottom 0.15: U2.11 13.5,4 R7.2 R6.1
N$12
  Bottom 0.25: 20.12,5.75 20.18,5.8 U2.1
  Bottom 0.3: U2.2 U2.1
  Bottom 0.8: D2.A 19.25,7.38 19.5,7.62
  Bottom 1: 20.12,5.75 20.12,6.5 19.5,7.12 19.5,7.62 19.5,9.5 L2.2
N$13
  Bottom 0.15: U5.24 306.54,55.91 R34.1
N$14
  Bottom 0.15: U3.5 3.35,303.35 C24.2
N$15
  Bottom 0.15: U3.10 3.35,312.1 R15.2
N$16
  Bottom 0.15: C26.2 2.38,302.62 2.38,303.62 2.7,303.95 U3.6
N$17
  Bottom 0.15: C25.2 1.98,310.88 2.05,310.8 U3.8
N$18
  Bottom 0.15: U3.11 4,311.5 R13.2 R12.1
N$19
  Bottom 0.25: 5.75,304.88 5.8,304.82 U3.1
  Bottom 0.3: U3.2 U3.1
  Bottom 0.8: D3.A 7.38,306 7.88,305.5
  Bottom 1: 5.75,304.88 6.5,304.88 7.12,305.5 7.88,305.5 9.5,305.5 L3.2
N$20
  Bottom 0.5: CN2.VCC 313.9,32.73 FB1.1
N$26
  Bottom 0.15: U8.5 303.35,321.65 C38.2
N$27
  Bottom 0.15: U8.10 312.1,321.65 R30.2
N$28
  Bottom 0.15: C40.2 302.62,322.62 303.62,322.62 303.95,322.3 U8.6
N$29
  Bottom 0.15: C39.2 310.88,323.02 310.8,322.95 U8.8
N$30
  Bottom 0.15: U8.11 311.5,321 R28.2 R27.1
N$31
  Bottom 0.25: 304.88,319.25 304.82,319.2 U8.1
  Bottom 0.3: U8.2 U8.1
  Bottom 0.8: D5.A 305.75,317.62 305.5,317.88
  Bottom 1: 304.88,319.25 304.88,318.5 305.5,317.88 305.5,315.5 L5.2
N$38
  Bottom 0.15: U10.5 321.65,21.65 C52.2
N$39
  Bottom 0.15: U10.10 321.65,12.9 R40.2
N$40
  Bottom 0.15: C54.2 322.62,22.38 322.62,21.38 322.3,21.05 U10.6
N$41
  Bottom 0.15: C53.2 323.02,14.12 322.95,14.2 U10.8
N$42
  Bottom 0.15: U10.11 321,13.5 R38.2 R37.1
N$43
  Bottom 0.25: 319.25,20.12 319.2,20.18 U10.1
  Bottom 0.3: U10.2 U10.1
  Bottom 0.8: D7.A 317.62,19.25 317.88,19.5
  Bottom 1: 319.25,20.12 318.5,20.12 317.88,19.5 315.5,19.5 L7.2
N$95
  Bottom 0.25: U6.4 313.72,31.82 arc-45 314.07,31.68 314.23,31.52 arc45 314.5,31.41 arc45 315.2,31.7 315.38,31.88 arc-45 315.5,31.93 CN2.D-
N$96
  Bottom 0.25: U6.6 313.47,29.93 arc45 313.82,30.07 314.48,30.73 arc-45 315.44,31.12 CN2.D+
N$97  (via drill 0.3)
  Top 0.25: v316,44.12 arc45 315.88,43.82 315.88,41.58 arc-45 315.73,41.23 307.9,33.4 arc45 307.75,33.04 307.75,31.62 arc90 308.25,31.12 308.45,31.12 arc45 v308.75,31.25
  Bottom 0.25: U1.5 315.88,43.82 arc-45 v316,44.12 | v308.75,31.25 309.18,31.68 arc-45 309.53,31.82 U6.3
N$98  (via drill 0.3)
  Top 0.25: v315.25,44.12 arc-45 315.38,43.82 315.38,41.71 arc-45 315.32,41.57 307.54,33.79 arc45 307.25,33.09 307.25,31.62 arc90 308.25,30.62 308.45,30.62 arc-45 v308.75,30.5
  Bottom 0.25: U1.4 315.38,43.82 arc45 v315.25,44.12 | v308.75,30.5 309.18,30.07 arc45 309.53,29.93 U6.1
N$99
  Bottom 0.15: R21.1 308.75,38.5 Q4.1
N$100
  Bottom 0.15: Q5.1 311,42.5 R22.1
RS485_A
  Bottom 0.5: TP3.1 304.38,38.12 304.38,39.62 R18.2 304.62,40.12 U4.6
RS485_B
  Bottom 0.5: TP4.1 303.62,38.12 303.62,39.62 R18.1 303.38,40.12 U4.7
VIN
  Bottom 0.25: C31.2 306.88,16.12 305.98,15.22 U11.4 U11.3
  Bottom 1: C31.2 306.88,22.88
  pour Bottom (no thermals): 28.62,303.5 21.5,303.5 21.5,5.88 20.88,5.25 19.5,5.25 19.5,4.38 21.38,4.38 22.12,5.12 28.62,5.12
  pour Bottom (no thermals): 303.38,296.38 303.38,319.62 303.75,320 305.88,320 305.88,320.62 302,320.62 301,319.62 294,319.62 294,303.5 5.88,303.5 5.25,304.12 5.25,305.5 4.38,305.5 4.38,303.62 5.12,302.88 5.12,296.38
  pour Bottom (no thermals): 21.5,28.96 21.5,22 311.25,22 311.25,29.06
  pour Bottom (no thermals): 308.88,25.25 308.88,21.5 319.12,21.5 319.75,20.88 319.75,19.5 320.62,19.5 320.62,21.38 319.88,22.12 319.88,25.25